# EAGLE board 5VACDC (EAGLE 9.6.2)
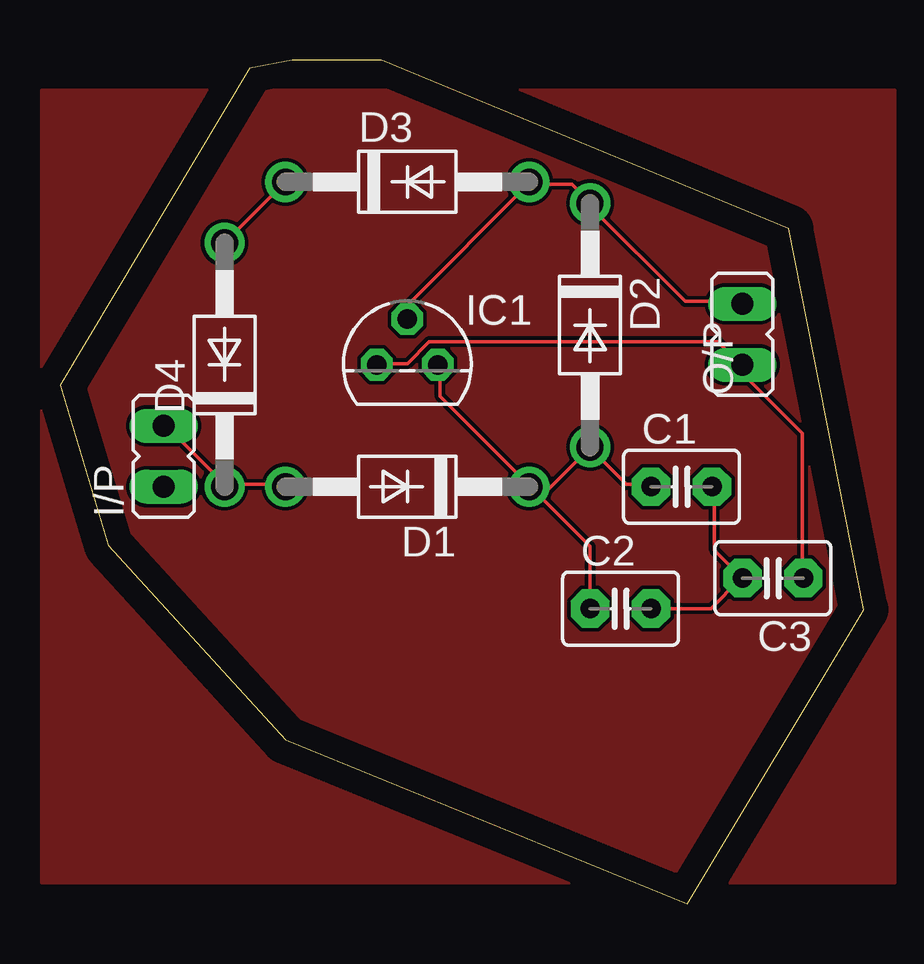
[diagram p0: board, top side]
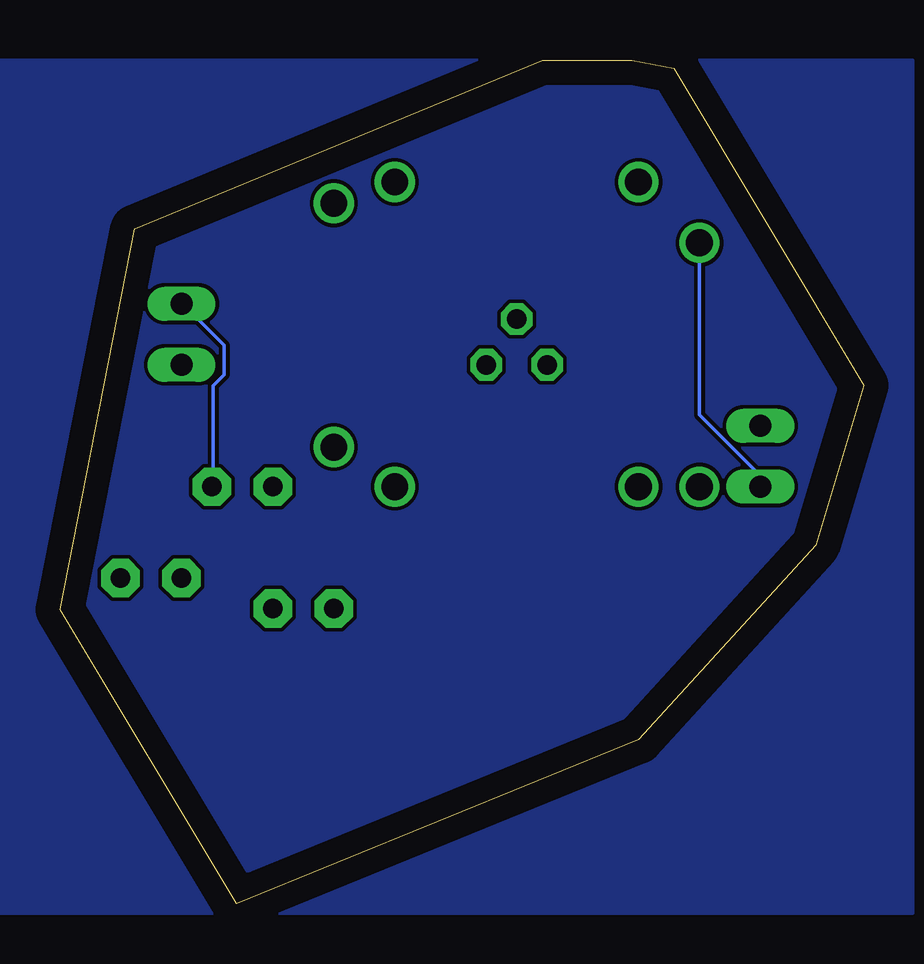
[diagram p1: board, bottom side, seen from below]

Size 33.52 x 35.15 mm. Coordinates in mm from the lower left corner, seen from the top.
Outline: 26.15,0 9.4,6.83 2.02,14.94 0,21.59 7.92,34.79 9.68,35.15 13.41,35.15 30.39,28.11 33.52,12.25 26.15,0
Outline: 26.15,0 26.15,0
Outline: 26.15,0 26.15,0
Copper layers (1*16): Top 0.035mm / dielectric 1.5mm / Bottom 0.035mm
Design rules "default": minimum track width 6mil, minimum drill 0.35mm, track to track 6mil, track to pad 6mil, pad to pad 6mil, via to via 6mil, smd to smd 6mil, copper to edge 40mil, drill to drill 6mil, minimum pad ring 10mil, minimum via ring 8mil, stop-mask expansion 4mil, vias tented up to drill 0mil, thermal gap 10mil

## Footprints (pad centres in the part's own frame; a part is rotated, then mirrored left to right if it is on the bottom)
C2.5-3 = drill 0.813 pad 1.6 octagon: 1 -1.27,0; 2 1.27,0
DO41-10 = drill 1.118: A 5.08,0; C -5.08,0
JP1 = drill 0.914 long: 1 0,-1.27; 2 0,1.27
TO92 = drill 0.813 octagon: 1 -1.27,0; 2 0,1.905; 3 1.27,0

## Placement (x,y rotation side)
C1  [C2.5-3]  25.91,17.37 0 top
C2  0.5  [C2.5-3]  23.37,12.29 0 top
C3  [C2.5-3]  29.72,13.56 180 top
D1  1N4004  [DO41-10]  14.48,17.37 180 top
D2  1N4004  [DO41-10]  22.1,24.1 270 top
D3  1N4004  [DO41-10]  14.48,30.07 0 top
D4  1N4004  [DO41-10]  6.86,22.45 90 top
I/P  [JP1]  4.32,18.64 0 top
IC1  7805L  [TO92]  14.48,22.45 0 top
O/P  [JP1]  28.45,23.72 0 top

## Library data of the parts
C1-C3 = capacitor-wima
D1-D4 = diode
I/P O/P = jumper
IC1 = linear

## Nets
N$1: D1.A D4.C I/P.2
N$2: C1.1 C2.1 D1.C D2.A IC1.3
N$3: C1.2 C2.2 C3.2 D2.C D3.A IC1.2 O/P.2
N$4: D3.C D4.A I/P.1
N$5: C3.1 IC1.1 O/P.1

## Tracks (layer width: path | path; a pad name or v marks a point on that pad's centre or on a via)
BOTTOM
  pour Bottom: -2.03,35.15 37.34,35.15 37.34,-0.41 -2.03,-0.41
N$1
  Top 0.152: 6.86,17.47 4.42,19.91 I/P.2 | 6.86,17.47 9.3,17.47 D1.A | 6.86,17.47 D4.C
N$2
  Top 0.152: 22.1,18.99 23.62,17.47 24.54,17.47 C1.1 | IC1.3 15.85,22.34 15.85,21.13 19.51,17.47 D1.C | C2.1 22.1,14.88 19.97,17.01 | 19.97,17.01 19.66,17.32 D1.C | 22.1,18.99 20.12,17.01 19.97,17.01 | 22.1,18.99 D2.A | 19.97,17.01 D1.C
N$3
  Top 0.152: IC1.2 14.48,24.94 19.51,29.96 D3.A 19.66,29.96 21.34,29.96 22.1,29.2 D2.C 22.1,29.05 26.06,25.09 28.35,25.09 O/P.2 | C2.2 27.13,12.29 28.35,13.51 C3.2 27.28,14.72 27.28,17.32 C1.2
  Bottom 0.152: C1.2 27.13,17.47 27.13,21.58 26.67,22.04 26.67,23.26 28.35,24.94 O/P.2
N$4
  Top 0.152: D4.A D3.C
  Bottom 0.152: D4.A 6.86,20.36 4.42,17.93 4.42,17.47 I/P.1
N$5
  Top 0.152: IC1.1 13.26,22.5 14.48,22.5 15.39,23.41 27.43,23.41 28.35,22.5 O/P.1 28.5,22.34 28.5,22.04 30.94,19.6 30.94,13.66 C3.1
TOP
  pour Top: -0.76,33.88 34.8,33.88 34.8,0.86 -0.76,0.86